# Altium PCB PCB1.PcbDoc
Units mm, origin at the board's own origin, x right, y up, seen from the top; angles counter-clockwise.
Board outline 50 x 50 mm, 2 copper layers (Top Layer, Bottom Layer); 18 components, 14 nets, 54 pads, 1 vias.
Unrouted connection lines stored in the file: 6.
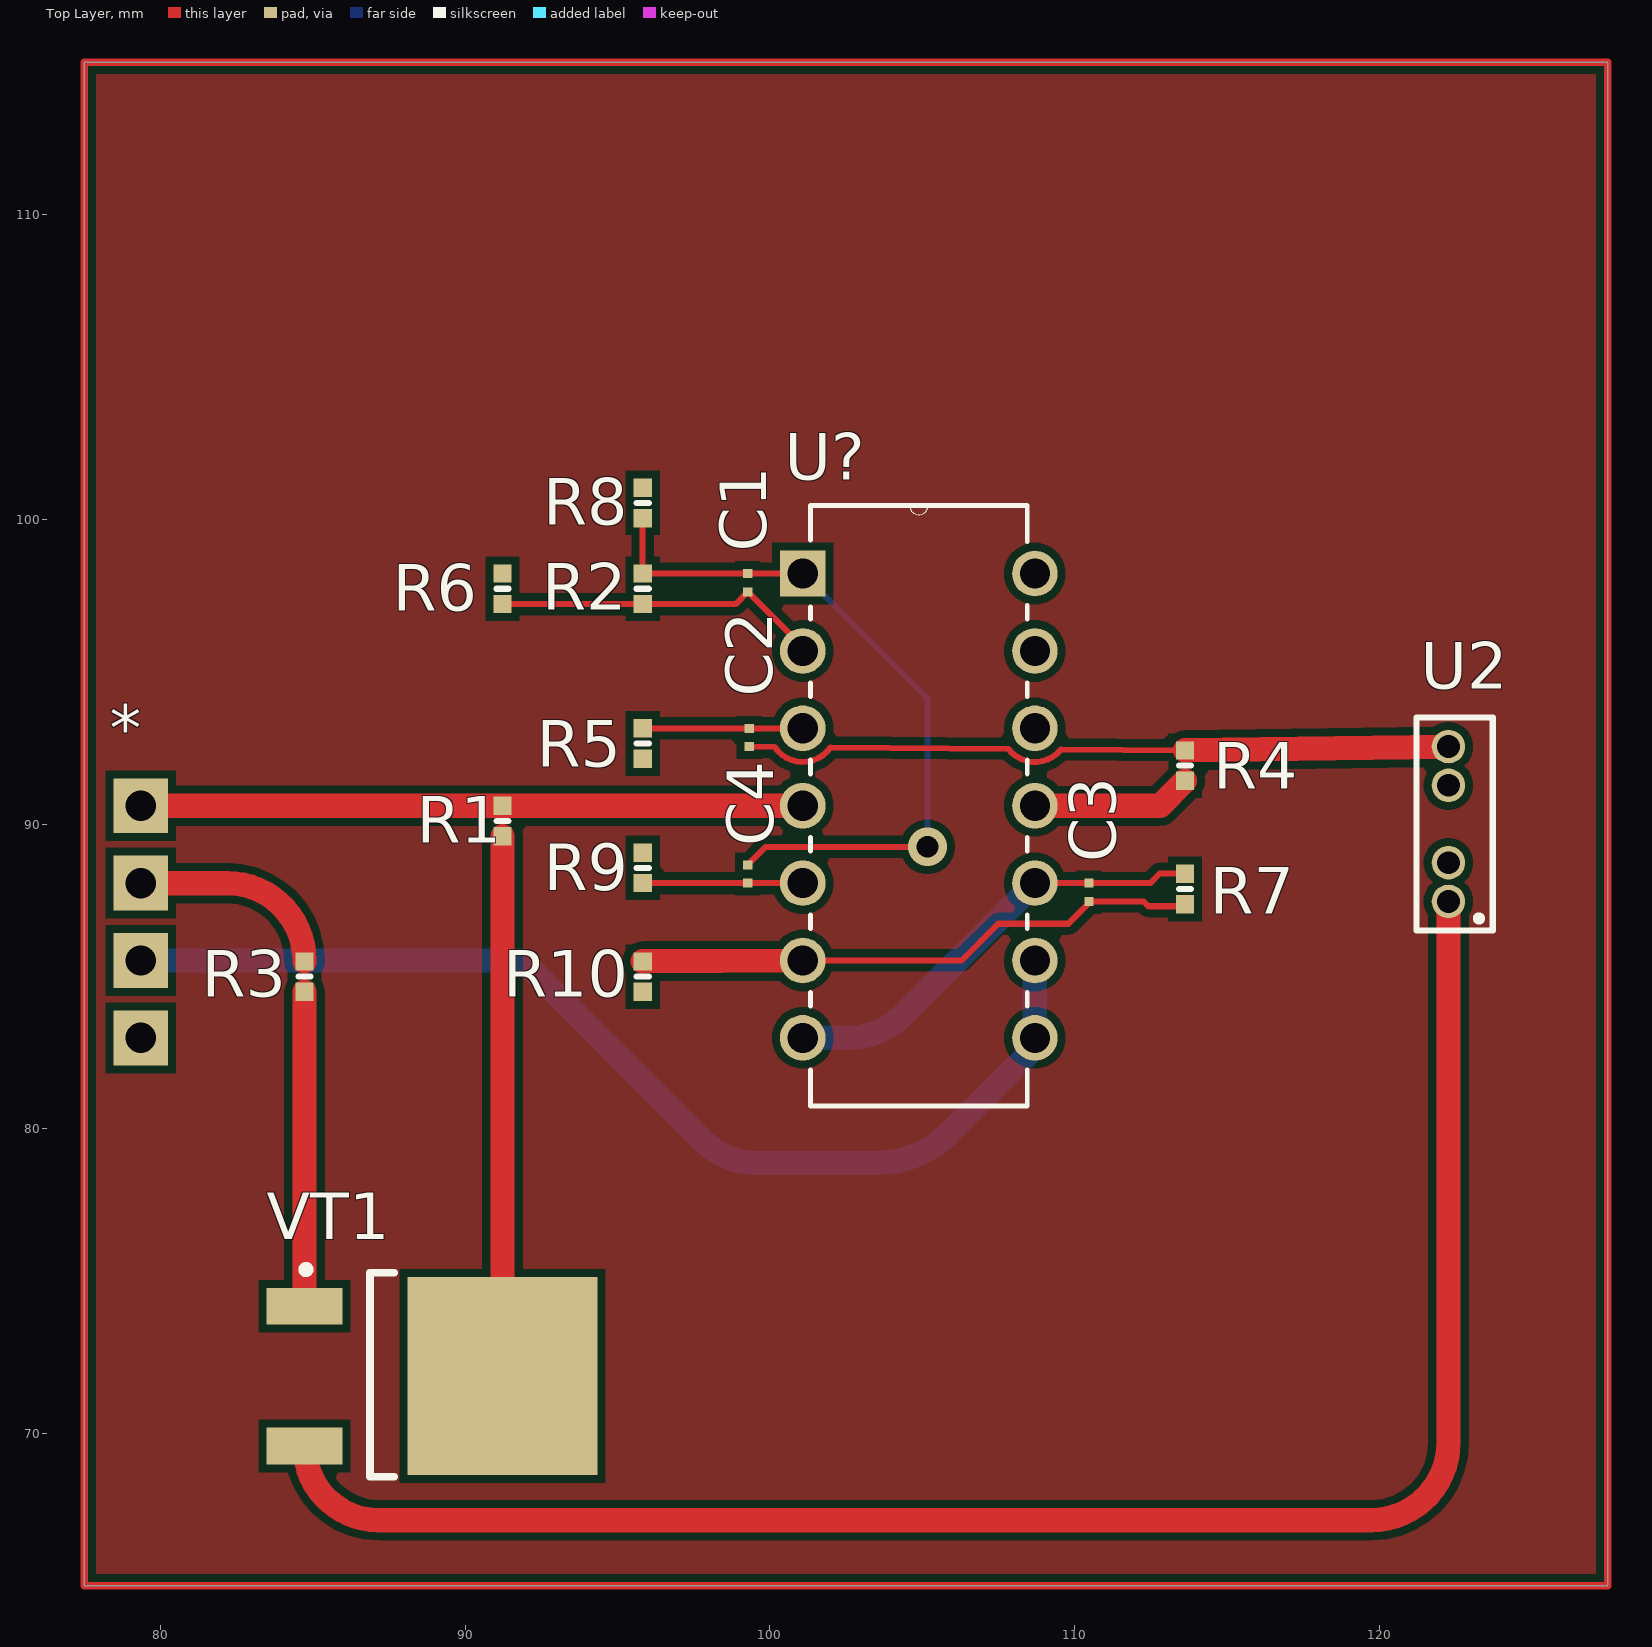
[diagram p0: Top Layer view]
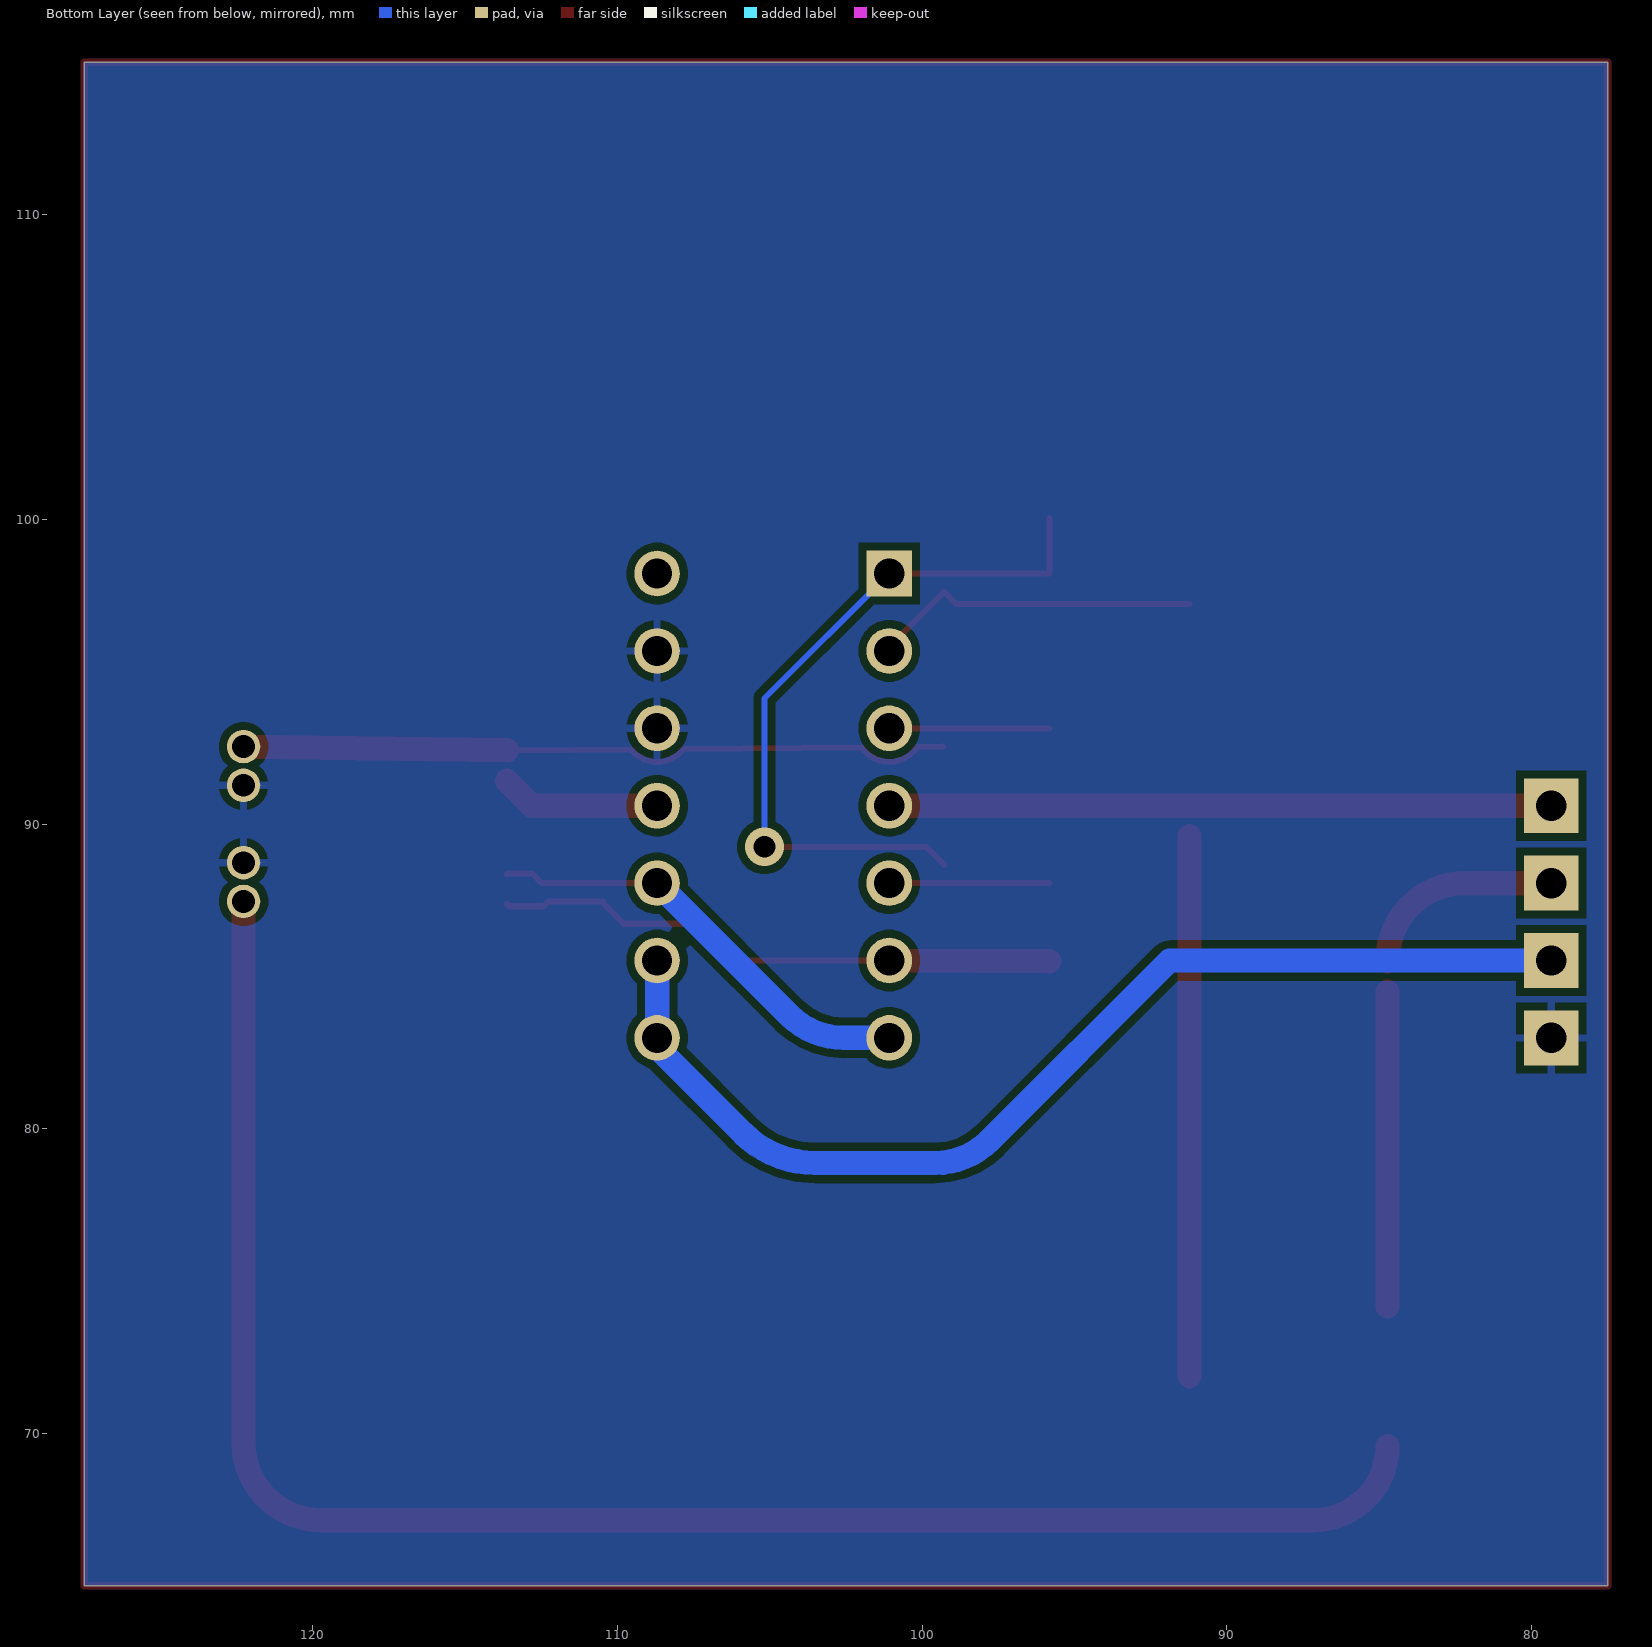
[diagram p1: Bottom Layer view, seen from below]
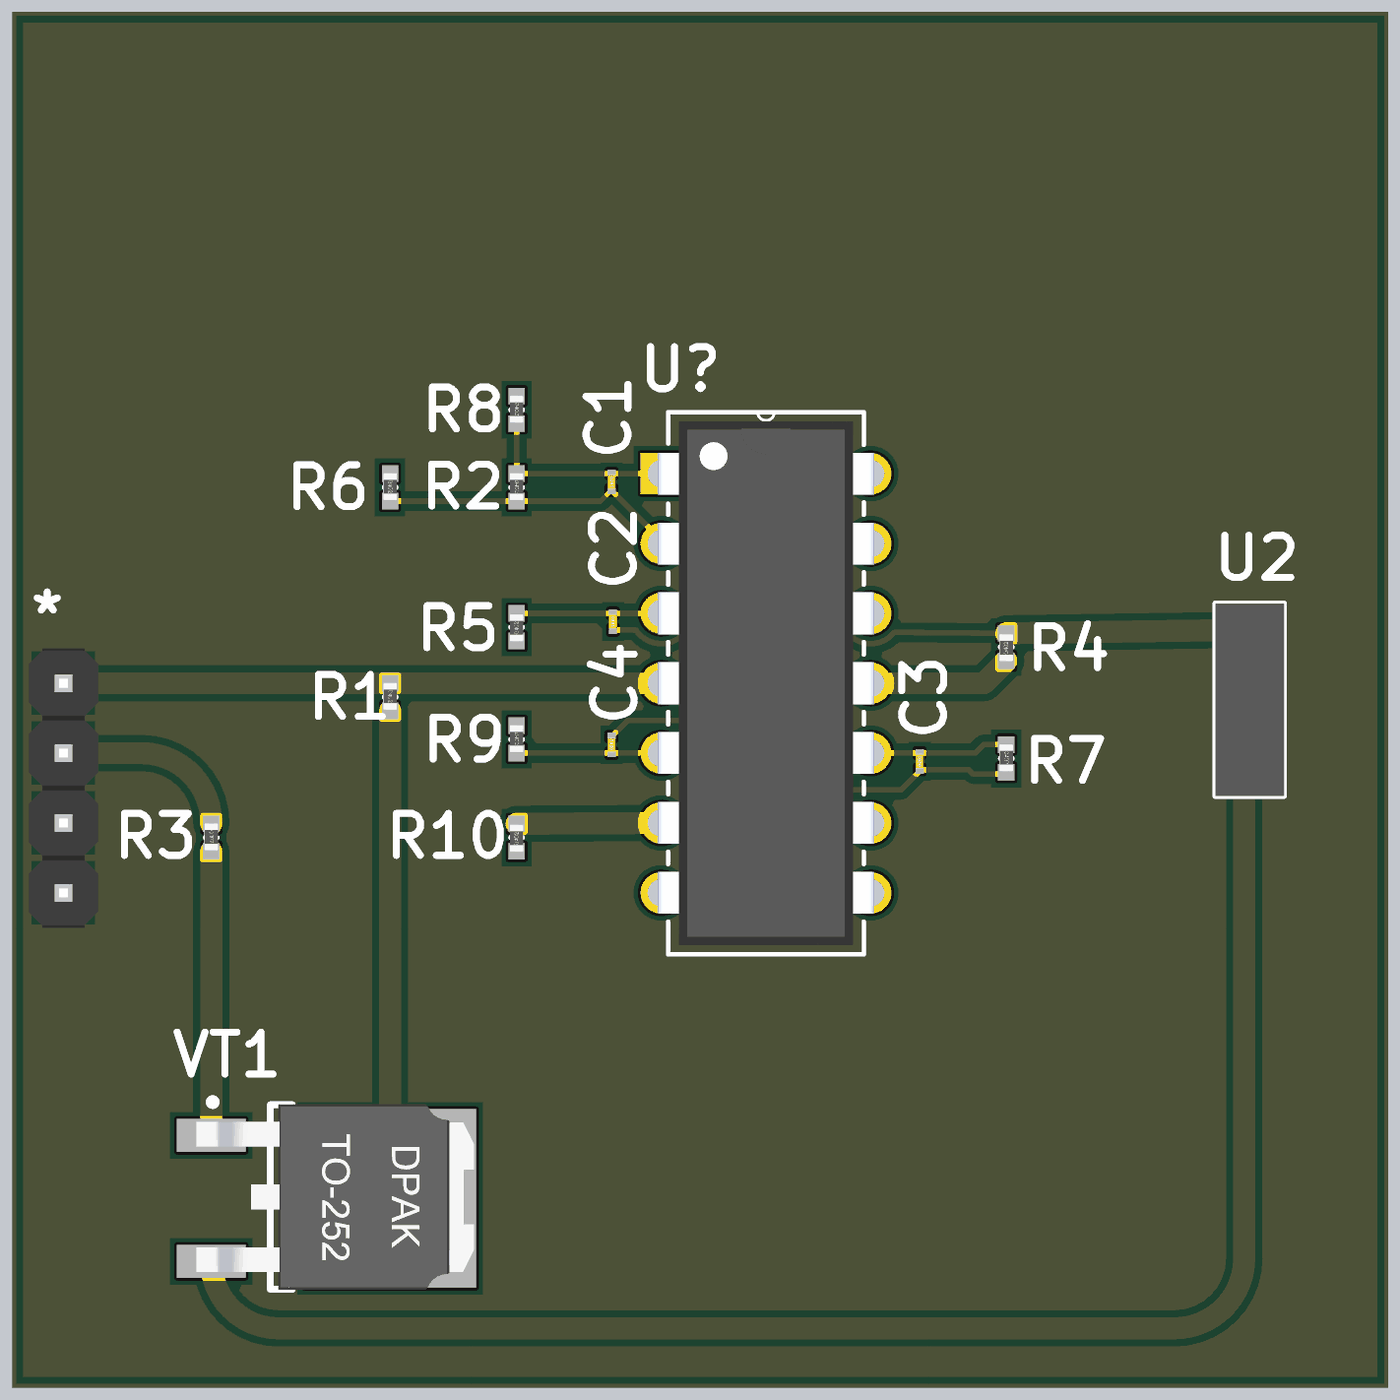
[diagram p2: 3D render of the assembled board from above, using the file's embedded part models]

## Layer stack, top to bottom
Top Solder: solder mask 0.0102, Solder Resist, Dk 3.5
Top Layer: signal copper 0.0356
Dielectric 1: dielectric 0.32, FR-4, Dk 4.8
Bottom Layer: signal copper 0.0356
Bottom Solder: solder mask 0.0102, Solder Resist, Dk 3.5

## Board outline
77.5,65 77.5,115 127.5,115 127.5,65

## Design rules (kind name [scope] priority, off if disabled: settings)
Clearance [All] p1: gap=0.254 ignorepadtopadclearanceinfootprint=FALSE except(0.2: Arc-Arc Arc-Track Arc-Via Track-Track Track-Via)
PolygonConnect [All] p1: connectstyle=Relief reliefconductorwidth=0.254 reliefentries=4 polygonreliefangle="90 Angle" airgapwidth=0.254
RoutingVias [All] p1: holewidth=0.711 width=1.27 viastyle="Through Hole" minholewidth=0.711 minwidth=1.27 maxholewidth=0.711 maxwidth=1.27
SolderMaskExpansion [All] p1: expansion=0.102 istentingtop=FALSE
SupplyNets "Schematic Supply Nets" [InNet('GND')] p1: voltage=0.000
Width [All] p1: maxlimit=0.8 minlimit=0.2 preferedwidth=0.5 minimp=50.000000 maximp=50.000000 favimp=50.000000
30 further rules are at their usual default settings.

## Classes and differential pairs
component class Sheet1: * C1 C2 C3 C4 R1 R2 R3 R4 R5 R6 R7 R8 R9 R10 U2 VT1

## Components (designator, comment, footprint, x,y, rotation, side; value= is the part's Value field where it differs from the comment)
* "Header 1x4" "Header 1x4 male" 79.35,88.06 r90 top
C1 "Ceramic capacitor, 100nF, X7R, ±10%, 16V, 0201, -55...+125°C" "CAP: 0201" 99.275,97.92 r270 top value=100nF
C2 "Ceramic capacitor, 4.7μF, X7R, ±10%, 16V, 0201, -55...+125°C" "CAP: 0201" 99.325,92.84 r270 top value=4.7μF
C3 "Ceramic capacitor, 100nF, X7R, ±10%, 16V, 0201, -55...+125°C" "CAP: 0201" 110.475,87.76 r90 top value=100nF
C4 "Ceramic capacitor, 4.7μF, X7R, ±10%, 16V, 0201, -55...+125°C" "CAP: 0201" 99.275,88.36 r90 top value=4.7μF
R1 "Resistor film, 150, ±5%, 0402, 0.063W, -55...+125°C" "RES: 0402" 91.225,90.1 r270 top value=150
R2 "Resistor film, 680k, ±5%, 0402, 0.063W, -55...+125°C" "RES: 0402" 95.825,97.72 r270 top value=680k
R3 "Resistor film, 1k, ±5%, 0402, 0.063W, -55...+125°C" "RES: 0402" 84.725,84.99 r270 top value=1k
R4 "Resistor film, 10k, ±5%, 0402, 0.063W, -55...+125°C" "RES: 0402" 113.625,91.915 r90 top value=10k
R5 "Resistor film, 47k, ±5%, 0402, 0.063W, -55...+125°C" "RES: 0402" 95.825,92.64 r90 top value=47k
R6 "Resistor film, 6.8k, ±5%, 0402, 0.063W, -55...+125°C" "RES: 0402" 91.225,97.72 r270 top value=6.8k
R7 "Resistor film, 680k, ±5%, 0402, 0.063W, -55...+125°C" "RES: 0402" 113.625,87.865 r270 top value=680k
R8 "Resistor film, 6.8k, ±5%, 0402, 0.063W, -55...+125°C" "RES: 0402" 95.825,100.54 r270 top value=6.8k
R9 "Resistor film, 47k, ±5%, 0402, 0.063W, -55...+125°C" "RES: 0402" 95.825,88.56 r270 top value=47k
R10 "Resistor film, 6.8k, ±5%, 0402, 0.063W, -55...+125°C" "RES: 0402" 95.825,84.99 r90 top value=6.8k
U2 "U_TCRT10X0" TCRT1000 122.475,90 r90 top
U? "MCP6004-I/P" DIP254P762X533-14 108.7,82.98 r0 top
VT1 "NPN transistor, 45V, 100mA, 100MHz, 300mW, 0.6V, 420, SOT-23, -55...+125°C" DPAK 87.975,71.875 r0 top

## Footprints (in the part's own frame and the unit in brackets; to place one, negate y for a bottom-side part, rotate by r counter-clockwise, add the part's x,y. Pads: shape width x height; smd on the part's side, far side on the other; paste and mask are expansions set on the pad)
"CAP: 0201" [mm]
  rect 0.3x0.3 smd: 1(-0.3,0) 2(0.3,0)
  body extent -0.3,-0.15 0.3,0.15, height 0.31
DIP254P762X533-14 [mil]
  rect 59x59 / inner round 59 / far side rect 59x59 hole 39: 1(-300,600)
  round 59 hole 39: 2(-300,500) 3(-300,400) 4(-300,300) 5(-300,200) 6(-300,100) 7(-300,0) 8(0,0) 9(0,100) 10(0,200) 11(0,300) 12(0,400) 13(0,500) 14(0,600)
  silkscreen extent -290,-88 -10,688, body extent -305,-75 5,675, height 210
DPAK [mm]
  rect 2.5x1.2 smd: 1(-3.25,2.29) 3(-3.25,-2.29)
  rect 6.25x6.5 smd: 2(3.25,0)
  round 0.5 on Mech1: ""(-3.2,2.9)
  silkscreen extent -3.32,-3.3 -0.3,3.62, body extent -3.8,-3.32 6.3,3.42, height 2.37
"Header 1x4 male" [mm] "2.54mm"
  rect 1.8x1.8 hole 1: 1(-5.08,0) 2(-2.54,0) 3(0,0) 4(2.54,0)
  body extent -6.35,-1.27 3.81,1.27, height 8.6
"RES: 0402" [mm]
  rect 0.6x0.6 smd: 1(-0.5,0) 2(0.5,0)
  silkscreen extent 0,-0.2 0,0.2, body extent -0.52,-0.25 0.47,0.25, height 0.34
TCRT1000 [mm]
  round 1.1 hole 0.75: 1(-2.54,0.2) 2(-1.27,0.2) 3(1.27,0.2) 4(2.54,0.2)
  silkscreen extent -3.5,-1.25 3.5,1.25, body extent -3.5,-1.25 3.5,1.25, height 6.31

## Part data
C1 C2 C3 C4: library part Ceramic_0201, Manufacturer=Yageo, Package=0201, PartNumber=CC0201KRX7R7BB103, Temperature=-55...+125°C, Tolerance=±10%, TypeCapacitor="Ceramic capacitor", TypeDielectric=X7R, Voltage=16V, HelpURL=https://www.digikey.com/product-detail/en/yageo/CC0201KRX7R7BB103/311-1404-1-ND/2833710
  C1 C3: ValueManufacturerPartNumber="Ceramic capacitor, 100nF, X7R, ±10%, 16V, 0201, -55...+125°C"
  C2 C4: ValueManufacturerPartNumber="Ceramic capacitor, 4.7μF, X7R, ±10%, 16V, 0201, -55...+125°C"
R1 R2 R3 R4 R5 R6 R7 R8 R9 R10: library part Resistor_0402, Manufacturer=Yageo, Package=0402, PartNumber=RC0402JR-07100RL, Power=0.063W, Temperature=-55...+125°C, Tolerance=±5%, TypeResistor="Resistor film", HelpURL=https://www.digikey.com/product-detail/en/yageo/RC0402JR-07100RL/311-100JRCT-ND/729362
  R1: ValueManufacturerPartNumber="Resistor film, 150, ±5%, 0402, 0.063W, -55...+125°C"
  R2 R7: ValueManufacturerPartNumber="Resistor film, 680k, ±5%, 0402, 0.063W, -55...+125°C"
  R3: ValueManufacturerPartNumber="Resistor film, 1k, ±5%, 0402, 0.063W, -55...+125°C"
  R4: ValueManufacturerPartNumber="Resistor film, 10k, ±5%, 0402, 0.063W, -55...+125°C"
  R5 R9: ValueManufacturerPartNumber="Resistor film, 47k, ±5%, 0402, 0.063W, -55...+125°C"
  R6 R8 R10: ValueManufacturerPartNumber="Resistor film, 6.8k, ±5%, 0402, 0.063W, -55...+125°C"
U?: "Microchip , Quad Op Amp, 1MHz CMOS, Rail to Rail, 3V, 5V, 14-Pin PDIP", Package="DIP-14 Microchip", Check_prices=https://www.snapeda.com/parts/MCP6004-I/P/Microchip/view-part/?ref=eda, MF=Microchip, MP=MCP6004-I/P, SnapEDA_Link=https://www.snapeda.com/parts/MCP6004-I/P/Microchip/view-part/?ref=snap
VT1: library part BJT_NPN_123, CurrentCE=100mA, CurrentGain=420, Frequency=100MHz, Manufacturer="ON Semiconductor", MaxPower=300mW, Package=SOT-23, PartNumber=BC847CLT1G, Temperature=-55...+125°C, VoltageCE=45V, VoltageSaturation=0.6V, HelpURL=https://www.digikey.com/product-detail/en/on-semiconductor/BC847CLT1G/BC847CLT1GOSCT-ND/917836, TypeTransistor="NPN transistor", ValueManufacturerPartNumber="NPN transistor, 45V, 100mA, 100MHz, 300mW, 0.6V, 420, SOT-23, -55...+125°C"

## Via types
v1: diameter 1.27, hole 0.711, Top Layer to Bottom Layer, 1 vias

## Nets (pads, with @x,y where several pads share a name; then routed paths per layer and width w, separated by ;. In a path a pad name is that pad's centre, name@x,y a point inside that pad or via, vN(x,y) a via of type N, cw(c..) or ccw(c..) an arc to the next point about the centre after c; other vN are vias at no path point)
EN: *.3 R3.1 | length 6.9
  Top Layer w0.8: *.3 82.185,88.06 cw(c82.185,85.52) 84.725,85.52 R3.1
GND: *.1 R5.1 R6.1 R8.1 R9.1 R10.1 U2.2 U2.3 U?.12 U?.13
NetC1_2: C1.2 R2.2 R6.2 U?.2 | length 10.9
  Top Layer w0.2: R6.2 R2.2 98.875,97.22 C1.2 101.08,95.815 U?.2
NetC2_1: C2.1 R5.2 U?.3 | length 5.3
  Top Layer w0.2: R5.2 C2.1 U?.3
NetC3_1: C3.1 R7.2 R10.2 U?.6 | length 18.7
  Top Layer w0.2: U?.6 106.295,85.52 107.5,86.725 109.8,86.725 110.475,87.4 C3.1 112.265,87.46 112.425,87.3 113.56,87.3 R7.2
  Top Layer w0.8: R10.2 U?.6
NetC3_2: C3.2 R7.1 U?.7 U?.10 | length 14.7
  Top Layer w0.2: U?.10 C3.2 112.485,88.06 112.8,88.375 113.615,88.375 R7.1
  Bottom Layer w0.8: U?.7 102.568,82.98 ccw(c102.568,85.52) 104.364,83.724 U?.10
NetC4_1: C4.1 R9.2 U?.5 | length 5.3
  Top Layer w0.2: R9.2 C4.1 U?.5
NetLabel9: C1.1 C4.2 R2.1 R8.2 U?.1 | length 23.9
  Top Layer w0.2: R8.2 R2.1 C1.1 U?.1 ; C4.2 99.865,89.25 v1(105.175,89.25)
  Bottom Layer w0.2: U?.1 105.175,94.125 v1(105.175,89.25)
NetR1_2: R1.2 VT1.2 | length 17.7
  Top Layer w0.8: VT1.2 R1.2
NetR3_2: R3.2 VT1.1 | length 10.3
  Top Layer w0.8: VT1.1 R3.2
NetU2_1: U2.1 VT1.3 | length 58.2
  Top Layer w0.8: VT1.3 ccw(c87.16,69.585) 87.16,67.15 119.735,67.15 ccw(c119.735,69.69) 122.275,69.69 U2.1
SENSOR: C2.2 R4.2 U2.4 | length 23.5
  Top Layer w0.2: C2.2 100.159,92.533 ccw(c101.08,93.14) 101.99,92.517 107.827,92.466 ccw(c108.7,93.14) 109.561,92.451 R4.2
  Top Layer w0.8: R4.2 U2.4
VCC: *.4 R1.1 R4.1 U?.4 U?.11 | length 27
  Top Layer w0.8: *.4 R1.1 U?.4 ; U?.11 112.81,90.6 R4.1
VOUT: *.2 U?.8 U?.9 | length 36.2
  Bottom Layer w0.8: *.2 91.88,85.52 97.781,79.619 ccw(c99.577,81.415) 99.577,78.875 103.529,78.875 ccw(c103.529,82.199) 105.879,79.849 108.48,82.449 ccw(c107.95,82.98) U?.8 U?.9
pads on no net: U?.14 VT1.
copper on no net: | length 200
  Top Layer w0.254: 77.5,65 127.5,65 127.5,115 77.5,115 77.5,65

## Polygon pours and split planes (outlines as drawn)
no net on Top Layer "NONET_L01_P000" (solid, pour order 0): 77.507,64.995 77.507,115 127.5,115 127.5,65
GND on Bottom Layer "GND_L02_P001" (solid, pour order 1): 77.5,65 77.5,115 127.5,115 127.5,65